# Altium PCB BLDCSuperBot.PcbDoc
Units mm, origin at the board's own origin, x right, y up, seen from the top; angles counter-clockwise.
Board outline 72 x 52 mm, 2 copper layers (Top Layer, Bottom Layer), stack 1.571 mm thick; 42 components, 30 nets, 142 pads, 52 vias.
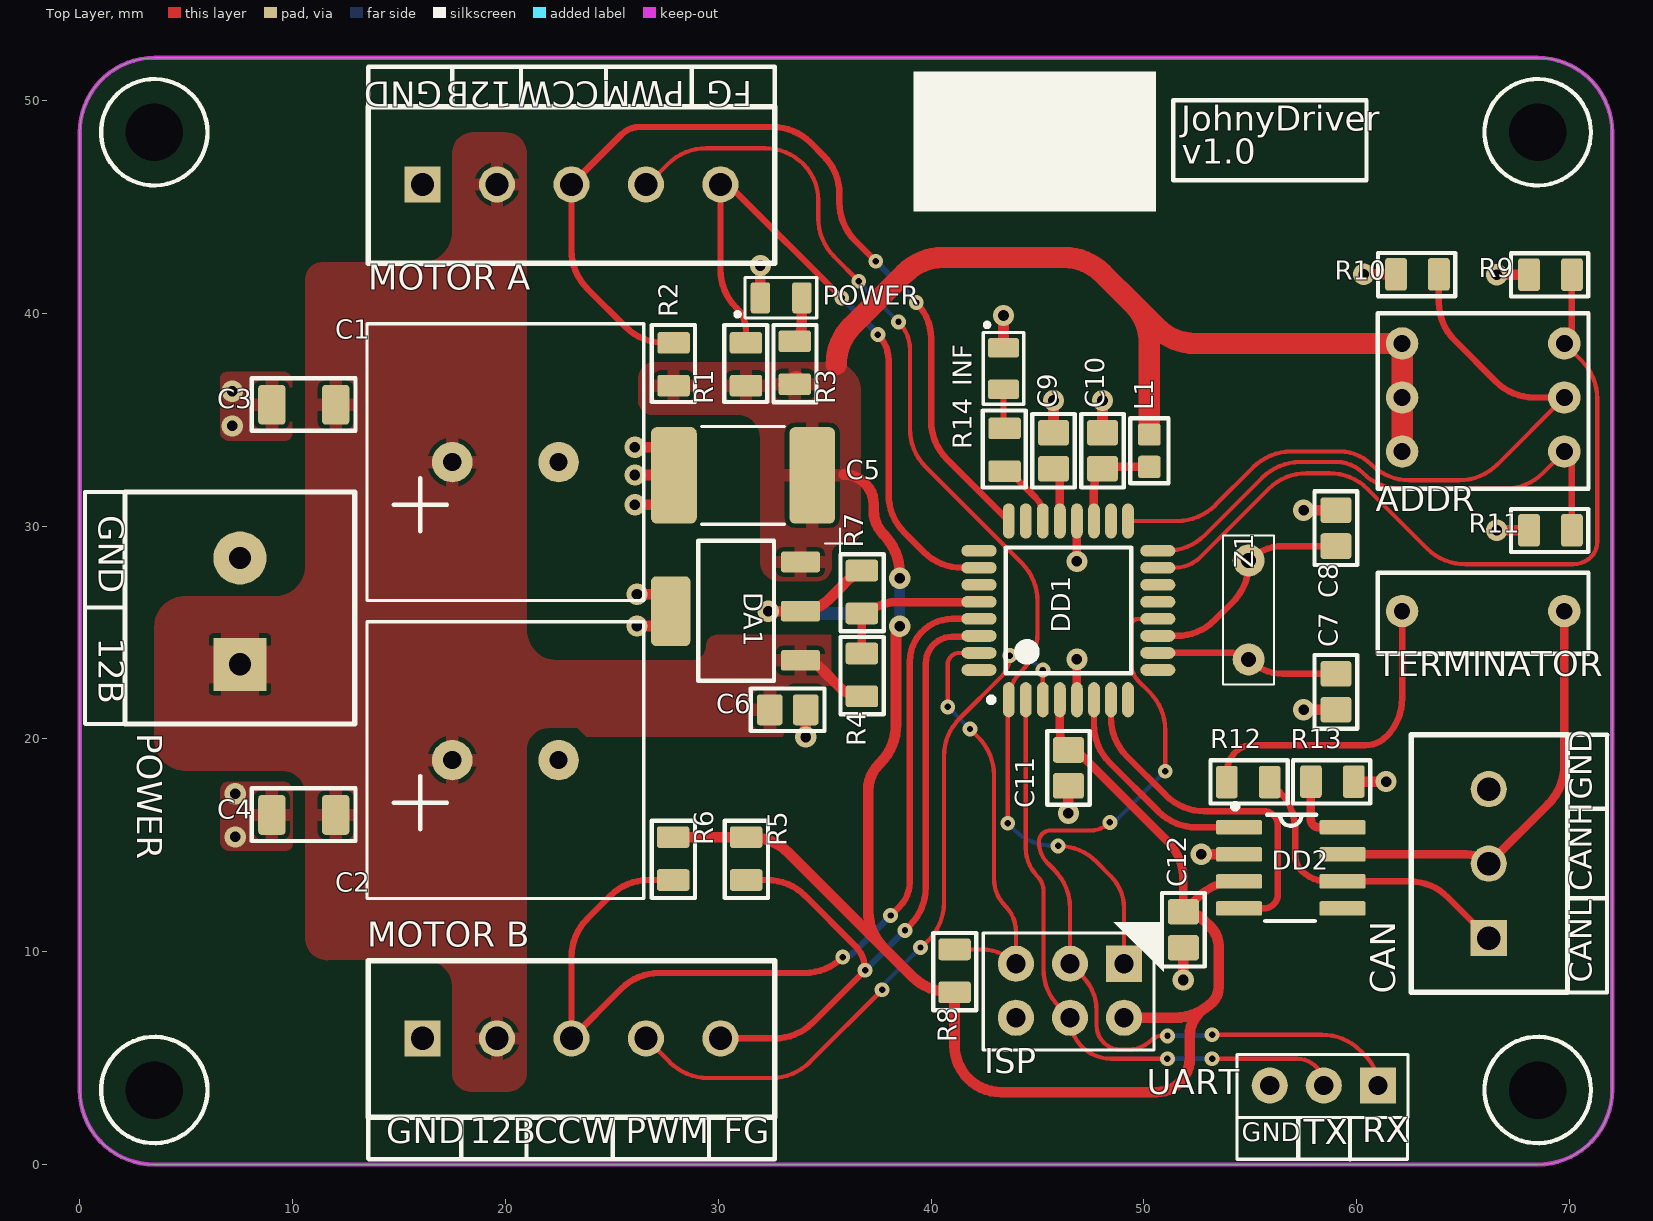
[diagram p0: Top Layer view]
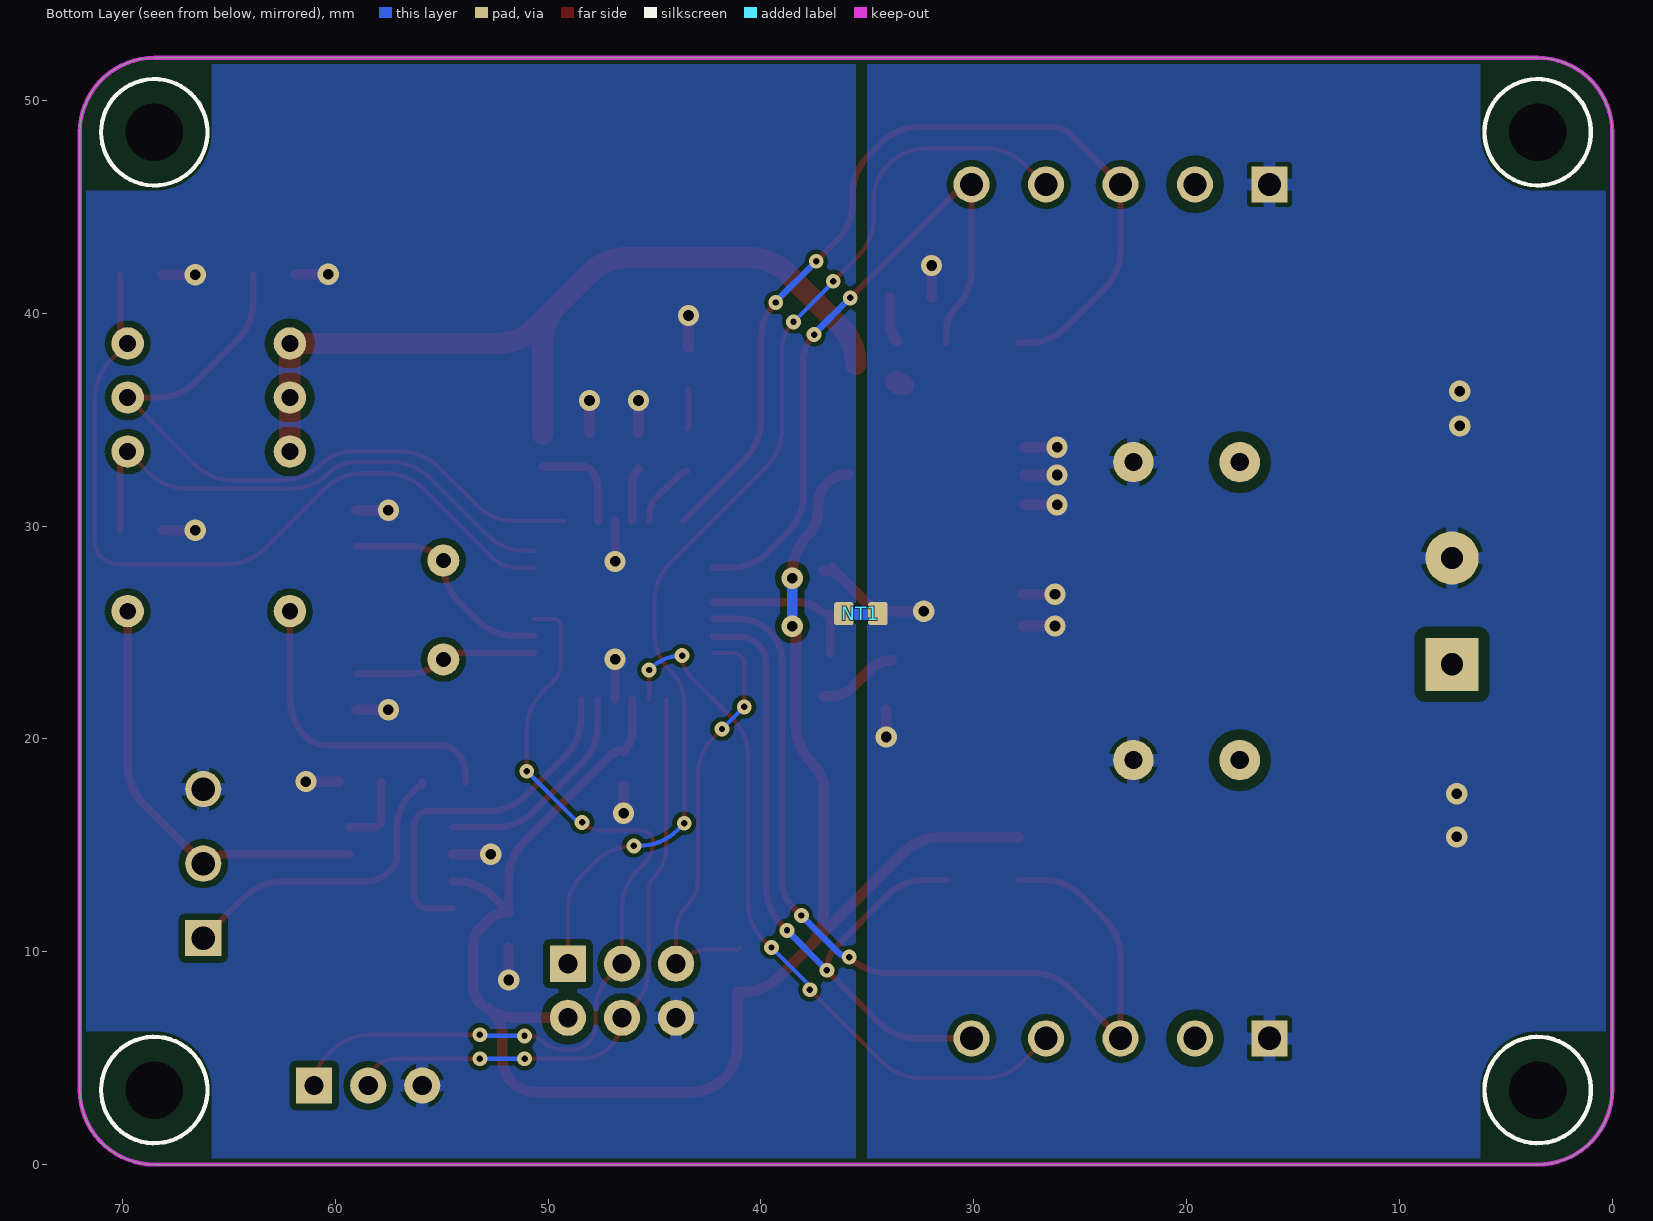
[diagram p1: Bottom Layer view, seen from below]

## Layer stack, top to bottom
Top Solder: solder mask 0.0102, Solder Resist, Dk 3.5
Top Layer: signal copper 0.0356
Dielectric 1: dielectric 1.5, FR-4, Dk 4.8
Bottom Layer: signal copper 0.0356
Bottom Solder: solder mask 0.0102, Solder Resist, Dk 3.5

## Board outline
0,3.5 ccw(c3.5,3.5) 3.5,0 68.5,0 ccw(c68.5,3.5) 72,3.5 72,48.5 ccw(c68.5,48.5) 68.5,52 3.5,52 ccw(c3.5,48.5) 0,48.5

## Design rules (kind name [scope] priority, off if disabled: settings)
Clearance Clearance_POWER_12B [InNet('12B') vs InNet('GND')] p1: gap=0.5 except(0.3: SMDPad-SMDPad)
Clearance Clearance_POWER_5B [InNet('5B') vs InNet('DGND')] p2: gap=0.3 except(0.2: SMDPad-SMDPad; 0.4: Arc-THPad Track-THPad THPad-THPad THPad-Fill THPad-Poly THPad-Region)
Clearance [All] p3: gap=0.2 except(0.3: Arc-THPad Track-THPad THPad-THPad THPad-Via THPad-Fill THPad-Poly THPad-Region THPad-Text)
HoleSize [All] p1: absolutevalues=TRUE maxlimit=5 minlimit=0.2 maxpercent=80.000 minpercent=20.000
HoleToHoleClearance [All] p1: gap=0 allowstackedmicrovias=TRUE
MinimumSolderMaskSliver [All] p1: minsoldermaskwidth=0.05
PolygonConnect NetTieDirect [InComponentClass('NetTieDirect')] p1: connectstyle=Direct reliefconductorwidth=0.254 reliefentries=4 polygonreliefangle="90 Angle" airgapwidth=0.254
PolygonConnect NetTieRelief [InComponentClass('NetTieRelief')] p2: connectstyle=Direct reliefconductorwidth=0.6 reliefentries=4 polygonreliefangle="90 Angle" airgapwidth=0.2
PolygonConnect PolygonConnect_GND [HasFootprint('TERMINAL 2 way-5mm') vs InNet('GND')] p3: connectstyle=Direct reliefconductorwidth=0.6 reliefentries=4 polygonreliefangle="90 Angle" airgapwidth=0.2
PolygonConnect PolygonConnect_GND_12B [HasFootprint('TERMINAL-2WAY-5MM') vs InNet('12B')] p4: connectstyle=Relief reliefconductorwidth=1.8 reliefentries=4 polygonreliefangle="90 Angle" airgapwidth=0.2
PolygonConnect PolygonConnect_GND_12B_2 [HasFootprint('TERMINAL-5WAY-5MM') vs InNet('12B')] p5: connectstyle=Relief reliefconductorwidth=1.8 reliefentries=4 polygonreliefangle="90 Angle" airgapwidth=0.2
PolygonConnect PolygonConnect_GND_12B_3 [HasFootprint('TERMINAL-5WAY-5MM_') vs InNet('12B')] p6: connectstyle=Relief reliefconductorwidth=1.8 reliefentries=4 polygonreliefangle="90 Angle" airgapwidth=0.2
PolygonConnect PolygonConnect_GND_12B_1 [HasFootprint('TERMINAL 3 way-3.5mm') vs InNet('12B')] p7: connectstyle=Direct reliefconductorwidth=0.6 reliefentries=4 polygonreliefangle="90 Angle" airgapwidth=0.2
PolygonConnect PolygonConnect_GND_1 [HasFootprint('TERMINAL 3 way-3.5mm') vs InNet('GND')] p8: connectstyle=Direct reliefconductorwidth=0.6 reliefentries=4 polygonreliefangle="90 Angle" airgapwidth=0.2
PolygonConnect PolygonConnect_via [IsVia] p9: connectstyle=Direct reliefconductorwidth=0.6 reliefentries=4 polygonreliefangle="90 Angle" airgapwidth=0.2
PolygonConnect [All] p10: connectstyle=Relief reliefconductorwidth=0.6 reliefentries=4 polygonreliefangle="90 Angle" airgapwidth=0.2
RoutingVias [All] p1: holewidth=0.711 width=1.27 viastyle="Through Hole" minholewidth=0.711 minwidth=1.27 maxholewidth=0.711 maxwidth=1.27
SilkToSilkClearance [All] p1: silktosilkclearance=0
SilkToSolderMaskClearance [IsPad] p1: minsilkscreentomaskgap=0 clearancetoexposedcopper=TRUE
SolderMaskExpansion [All] p1: expansion=0.05
Width [All] p1: maxlimit=3 minlimit=0.2 preferedwidth=0.3
25 further rules are at their usual default settings.

## Classes and differential pairs
component class NetTieDirect: NT1
component class NetTieRelief: NT1

## Components (designator, comment, footprint, x,y, rotation, side; value= is the part's Value field where it differs from the comment)
ADDR "Name" DIP3 69.75,33.5 r90 top (schematic designator SW1)
C1 "Capacitor_pol" K50-35(13X25)_V 20,33 r90 top
C2 "Capacitor_pol" K50-35(13X25)_V 20,19 r90 top
C3 "Capacitor" C1206 10.552,35.724 r0 top
C4 "Capacitor" C1206 10.552,16.45 r0 top
C5 "Capacitor_pol" "TANTAL CASE D" 31.214,32.382 r180 top
C6 "Capacitor" C0805 33.259,21.366 r180 top
C7 "Capacitor" C0805 59.017,22.211 r270 top
C8 "Capacitor" C0805 59.017,29.901 r90 top
C9 "Capacitor" C0805 45.75,33.538 r270 top
C10 "Capacitor" C0805 48.05,33.538 r270 top
C11 "Capacitor" C0805 46.45,18.638 r90 top
C12 "Capacitor" C0805 51.85,11.031 r90 top
CAN "Header_3_trm" TERMINAL-3WAY-3.5MM 66.2,5.388 r90 top (schematic designator X5)
DA1 "LM2940IMP" SOT-223 30.839,26 r90 top
DD1 "ATmega32M1-AU" TQFP-32 46.45,26.038 r90 top
DD2 "MCP2551-I/SN" SO8 56.9,13.938 r0 top
INF "LED" L_0805 43.4,37.4 r270 top (schematic designator VD2)
ISP "Программатор ISP mkII" PLS2-6 46.425,8.161 r270 top (schematic designator X4)
L1 "Inductor" L0603 50.25,33.538 r90 top
"MOTOR A" "Header_5_trm" TERMINAL-5WAY-3.5MM_ 17.852,46.048 r0 top (schematic designator X2)
"MOTOR B" "Header_5_trm" TERMINAL-5WAY-3.5MM 17.852,5.925 r0 top (schematic designator X3)
NT1 "" Pofigistor0603 35.3,25.885 r0 bottom net-tie
POWER "LED" L_0805 32.954,40.723 r0 top (schematic designator VD1)
POWER "Header_2_trm" TERMINAL-2WAY-5MM 7.525,26 r90 top (schematic designator X1)
R1 "Resistor_0,125Вт" R0805 31.3,37.6 r90 top
R2 "Resistor_0,125Вт" R0805 27.9,37.6 r90 top
R3 "Resistor_0,125Вт" R0805 33.591,37.671 r270 top
R4 "Resistor_0,125Вт" R0805 36.744,23.006 r270 top
R5 "Resistor_0,125Вт" R0805 31.306,14.375 r270 top
R6 "Resistor_0,125Вт" R0805 27.875,14.375 r270 top
R7 "Resistor_0,125Вт" R0805 36.744,26.902 r270 top
R8 "Resistor_0,125Вт" R0805 41.1,9.1 r270 top
R9 "Resistor_0,125Вт" R0805 69.1,41.812 r180 top
R10 "Resistor_0,125Вт" R0805 62.85,41.825 r180 top
R11 "Resistor_0,125Вт" R0805 69.1,29.8 r180 top
R12 "Resistor_0,125Вт" R0805 54.9,17.967 r0 top
R13 "Resistor_0,125Вт" R0805 58.851,17.992 r180 top
R14 "Resistor_0,125Вт" R0805 43.45,33.583 r90 top
TERMINATOR "DS1040-01" DIP1 69.75,26 r90 top (schematic designator SW2)
UART "Header_3_plg" PLS-3 58.45,3.714 r270 top (schematic designator X6)
Z1 "Crystal" HC-49S 54.917,26.056 r270 top

## Footprints (in the part's own frame and the unit in brackets; to place one, negate y for a bottom-side part, rotate by r counter-clockwise, add the part's x,y. Pads: shape width x height; smd on the part's side, far side on the other; paste and mask are expansions set on the pad)
C0805 [mm]
  rrect25% 1.21x1.46 smd paste-5: 1(-0.845,0) 2(0.845,0)
  silkscreen extent -1.73,-1 1.73,1, body extent -1,-0.62 1,0.63, height 0.78
C1206 [mm]
  rrect25% 1.28x1.87 smd: 1(-1.528,-0.024) 2(1.472,-0.024)
  silkscreen extent -2.48,-1.25 2.4,1.23, body extent -1.6,-0.85 1.6,0.85, height 1.75
DIP1 [mil]
  round 60 hole 30: 1(0,0) 2(0,300)
  silkscreen extent -79,-45 71,345, body extent -80,-42 71,342, height 269
DIP3 [mil]
  round 60 hole 31.5: 1(0,0) 2(100,0) 3(200,0) 4(200,300) 5(100,300) 6(0,300)
  silkscreen extent -69,-45 256,345, body extent -69,-43 251,346, height 276
HC-49S [mm] "Кварцевый резонатор"
  round 1.5 hole 0.7: 1(-2.325,0) 2(2.325,0)
  silkscreen extent -3.5,-1.2 3.5,1.2, body extent -5.67,-2.32 5.68,2.33, height 3.6
K50-35(13X25)_V [mm]
  round 1.9 hole 0.85 mask+0.102: 1(0,2.5)
  round 1.9 hole 0.85: 2(0,-2.5)
  silkscreen extent -6.5,-6.5 6.5,6.5, body extent -6.25,-6.25 6.25,6.25, height 25
L0603 [mm]
  rrect25% 1.05x1.07 smd paste-5: 1(-0.76,0) 2(0.76,0)
  silkscreen extent -1.53,-0.9 1.53,0.9, body extent -0.8,-0.4 0.8,0.4, height 0.8
L_0805 [mm] "SMD LED LAMP"
  rrect25% 0.91x1.46 smd: 1(-0.975,0) 2(0.975,0)
  silkscreen extent -2.15,-0.95 1.68,0.95, body extent -1.01,-0.62 1.01,0.63, height 1.1
PLS2-6 [mm] "Разъем для программатора ISP"
  rect 1.7x1.7 hole 0.9: 1(-1.275,2.64)
  round 1.7 hole 0.9: 2(1.265,2.64) 3(-1.275,0.1) 4(1.265,0.1) 5(-1.275,-2.44) 6(1.265,-2.44)
  silkscreen extent -2.73,-3.98 2.77,4.05, body extent -2.54,-3.81 2.54,3.81, height 8.54
PLS-3 [mm] "Разъем для программатора ISP"
  rect 1.7x1.7 hole 0.9: 1(0,2.54)
  round 1.7 hole 0.9: 2(0,0) 3(0,-2.54)
  silkscreen extent -1.45,-4.08 1.5,3.95, body extent -1.27,-3.91 1.27,3.71, height 8.54
Pofigistor0603 [mm]
  rrect25% 0.92x1.08 smd paste+0: 1(-0.8,0)
  rrect25% 0.92x1.08 smd: 2(0.8,0)
  Top Layer region: -0.8,0.3 0.8,0.3 0.8,-0.3 -0.8,-0.3
R0805 [mm] "Chip Resistor, 2-Leads, Body 2,10x1,30mm, IPC Medium Density"
  rrect25% 1.02x1.53 smd paste-5: 1(-1.008,0) 2(1.008,0)
  silkscreen extent -1.78,-1 1.85,1.02, body extent -1.1,-0.7 1.1,0.7, height 0.55
SO8 [mm]
  rrect25% 2.17x0.68 smd: 1(-2.43,1.905) 2(-2.43,0.635) 3(-2.43,-0.635) 4(-2.43,-1.905) 5(2.43,-1.905) 6(2.43,-0.635) 7(2.43,0.635) 8(2.43,1.905)
  silkscreen extent -2.74,-2.5 1.2,3.02, body extent -3,-2.54 3,2.54, height 1.7
SOT-223 [mm]
  rrect25% 0.97x1.85 smd: 1(-2.311,-3.024) 2(0,-3.024) 3(2.311,-3.024)
  rrect25% 3.27x1.85 smd: 2(0,3.074)
  silkscreen extent -3.28,-1.78 3.3,1.78, body extent -3.25,-3.54 3.25,3.54, height 1.65
"TANTAL CASE D" [mm]
  rrect25% 2.15x4.53 smd: 1(-3.2,0) 2(3.3,0)
  silkscreen extent -5.2,-2.3 2,4, body extent -3.8,-2.3 3.8,2.3, height 4
TERMINAL-2WAY-5MM [mm]
  rect 2.5x2.5 hole 1.05: 1(-2.5,0)
  round 2.5 hole 1.05: 2(2.5,0)
  silkscreen extent -5.3,-5.4 5.6,5.4, body extent -5,-5.07 5.3,5.13, height 14.3
TERMINAL-3WAY-3.5MM [mm]
  rect 1.7x1.7 hole 1.1: 1(5.25,0)
  round 1.7 hole 1.1: 2(8.75,0) 3(12.25,0)
  silkscreen extent 2.7,-3.7 14.8,3.65, body extent 3,-3.37 14.5,3.43, height 8.4
TERMINAL-5WAY-3.5MM [mm]
  rect 1.7x1.7 hole 1.1: 1(-1.75,0)
  round 1.7 hole 1.1: 2(1.75,0) 3(5.25,0) 4(8.75,0) 5(12.25,0)
  silkscreen extent -4.3,-3.7 14.8,3.65, body extent -4,-3.37 14.5,3.43, height 8.4
TERMINAL-5WAY-3.5MM_ [mm]
  rect 1.7x1.7 hole 1.1: 1(-1.75,0)
  round 1.7 hole 1.1: 2(1.75,0) 3(5.25,0) 4(8.75,0) 5(12.25,0)
  silkscreen extent -4.3,-3.7 14.8,3.65, body extent -4,-3.43 14.5,3.37, height 8.4
TQFP-32 [mm] "Thin QFP, 32-Leads, Body 7x7mm, Pitch 0.8mm, IPC Medium Density"
  oval 1.65x0.55 smd: 1(-4.2,2.8) 2(-4.2,2) 3(-4.2,1.2) 4(-4.2,0.4) 5(-4.2,-0.4) 6(-4.2,-1.2) 7(-4.2,-2) 8(-4.2,-2.8) 17(4.2,-2.8) 18(4.2,-2) 19(4.2,-1.2) 20(4.2,-0.4) 21(4.2,0.4) 22(4.2,1.2) 23(4.2,2) 24(4.2,2.8)
  oval 0.55x1.65 smd: 9(-2.8,-4.2) 10(-2,-4.2) 11(-1.2,-4.2) 12(-0.4,-4.2) 13(0.4,-4.2) 14(1.2,-4.2) 15(2,-4.2) 16(2.8,-4.2) 25(2.8,4.2) 26(2,4.2) 27(1.2,4.2) 28(0.4,4.2) 29(-0.4,4.2) 30(-1.2,4.2) 31(-2,4.2) 32(-2.8,4.2)
  silkscreen extent -4.32,-2.95 2.95,3.75, body extent -4.6,-4.6 4.6,4.6, height 1.2

## Part data
ADDR: library part btn6, "DIP переключатель адреса"
C1 C2: library part cap262, "Конденсатор полярный"
C3 C4: library part cap188, "Конденсатор"
C5: library part cap260, "Конденсатор полярный"
C6: library part cap148, "Конденсатор"
C7 C8: library part cap222, "Конденсатор"
C9 C10 C11 C12: library part cap161, "Конденсатор"
CAN: library part connect35, "Разъем - 3 конт. клеммник"
DA1: library part pwr4, "Low-Dropout Regulator for 5-V to 3.3-V Conversion"
DD1: library part microcont12, "Микроконтроллер 8-Бит, AVR, 16МГц, 32КБ Flash"
DD2: library part interf12, "High-Speed CAN Transceiver"
INF POWER: library part diode5, "Светодиод"
ISP: library part connect0, "Разъем - 6 конт. розетка"
L1: library part ind0, "EMI Suppression Filter"
"MOTOR A": library part connect61, "Разъем - 5 конт. клеммник"
"MOTOR B": library part connect60, "Разъем - 5 конт. клеммник"
NT1: library part res1930
POWER: library part connect21, "Разъем - 2 конт. клеммник"
R1 R2 R5 R6 R8 R9 R10 R11 R13: library part res97, "Резистор"
R3 R14: library part res66, "Резистор"
R4 R7: library part res84, "Резистор"
R12: library part res51, "Резистор"
TERMINATOR: library part btn1, "DIP переключатель"
UART: library part connect33, "Разъем - 3 конт. вилка"
Z1: library part crystal7, "Кварцевый резонатор"

## Free pads (board coordinates)
  round 0 hole 2.7 unplated: ""(3.5,3.5) ""(3.5,48.5) ""(68.5,3.5) ""(68.5,48.5)

## Via types
v1: diameter 1, hole 0.5, Top Layer to Bottom Layer, tented both sides, 28 vias
v2: diameter 0.7, hole 0.3, Top Layer to Bottom Layer, tented both sides, 24 vias

## Nets (pads, with @x,y where several pads share a name; then routed paths per layer and width w, separated by ;. In a path a pad name is that pad's centre, name@x,y a point inside that pad or via, vN(x,y) a via of type N, cw(c..) or ccw(c..) an arc to the next point about the centre after c; other vN are vias at no path point)
5B: ADDR.4 ADDR.5 ADDR.6 C5.1 C11.2 C12.2 DA1.3 DD1.4 DD2.3 ISP.2 L1.2 R1.1 R2.1 R3.2 R5.1 R6.1 R8.2 | length 126.1
  Top Layer w0.4: DD1.4 46.05,20.348 ccw(c47.416,20.348) C11.2@46.45,19.383 ; C11.2@46.851,19.316 ccw(c46.45,18.915) C11.2 cw(c46.45,18.613) 47.065,19.228 51.106,15.186 cw(c49.31,13.39) 51.85,13.39 C12.2 52.533,12.559 cw(c54.329,10.763) 54.329,13.303 DD2.3
  Top Layer w0.5: R6.1 R5.1 31.518,15.382 cw(c31.518,12.842) 33.314,14.639 37.753,10.2 ; 35.898,32.423 cw(c35.898,31.021) 37.3,31.021 37.3,30.736 ccw(c38.925,30.736) 37.776,29.587 cw(c35.98,27.791) 38.52,27.791 v1(38.52,27.553) ; v1@38.52,25.337 ccw(c38.935,24.921) 38.348,24.921 38.348,20.655 cw(c35.808,20.655) 37.604,18.859 37.545,18.8 ccw(c38.754,17.591) 37.044,17.591 37.044,11.911 ccw(c39.464,11.911) 37.753,10.2 ; ISP.2 51.428,6.896 ccw(c51.428,9.436) 52.733,7.256 ; C12.2 cw(c51.85,10.519) 52.809,11.478 53.15,11.138 cw(c52.287,10.274) 53.508,10.274 53.508,8.325 cw(c52.539,8.325) 53.224,7.639 cw(c51.428,9.436) 52.733,7.256 ; 37.753,10.2 39.116,8.836 ccw(c40.912,10.633) 40.912,8.093 R8.2 41.1,5.586 ccw(c43.286,5.586) 43.286,3.4 50.581,3.4 ccw(c50.581,4.969) 52.15,4.969 52.15,6.064 cw(c53.621,6.064) 52.581,7.105 52.733,7.256
  Top Layer w1: R3.2@33.3,36.626 ccw(c33.3,37.131) R3.2@33.657,36.774 ; 35.54,37.604 cw(c38.08,37.604) 36.284,39.401 38.755,41.872 cw(c40.551,40.076) 40.551,42.616 46.255,42.616 cw(c46.255,40.076) 48.051,41.872 49.506,40.417 ; L1.2 50.25,38.621 ccw(c47.71,38.621) 49.506,40.417 ; ADDR.6 ADDR.5 ADDR.4 52.395,38.58 cw(c52.395,41.12) 50.599,39.324 49.506,40.417
  Bottom Layer w0.5: v1(38.52,25.29) v1(38.52,27.553) v1@38.52,27.6
12B: "MOTOR A.2" "MOTOR B.2" C1.1 C2.1 C3.2 C4.2 C6.2 DA1.1 POWER.1@7.525,23.5 R4.2 | length 3.8
  Top Layer w0.5: DA1.1 cw(c33.863,22.289) 34.852,23.279 35.701,22.431 ccw(c36.744,23.474) R4.2 R4.2@37.044,21.999
ADR0: ADDR.1 DD1.16 R11.1 | length 25.4
  Top Layer w0.2: DD1.16 51.073,28.838 ccw(c51.073,31.378) 52.869,29.581 55.551,32.264 cw(c57.347,30.468) 57.347,33.008 59.047,33.008 cw(c59.047,31.253) 60.287,32.494 ccw(c62.083,34.29) 62.083,31.75 66.948,31.75 ccw(c66.948,34.29) 68.744,32.494 ADDR.1
  Top Layer w0.3: ADDR.1 cw(c68.888,32.638) 70.107,32.638 R11.1
ADR1: ADDR.2 DD1.17 R10.1 | length 32.9
  Top Layer w0.2: DD1.17 51.557,30.238 ccw(c51.557,32.778) 53.353,30.981 55.127,32.756 cw(c56.923,30.96) 56.923,33.5 59.219,33.5 cw(c59.219,31.439) 60.676,32.896 ccw(c62.472,34.693) 62.472,32.153 64.81,32.153 ccw(c64.81,34.693) 66.606,32.896 ADDR.2
  Top Layer w0.3: R10.1 63.857,40.519 ccw(c66.397,40.519) 64.601,38.723 66.54,36.784 ccw(c68.336,38.58) 68.336,36.04 ADDR.2
ADR2: ADDR.3 DD1.15 R9.1 | length 37.6
  Top Layer w0.2: DD1.15 51.431,28.038 ccw(c51.431,29.766) 52.653,28.544 55.85,31.741 cw(c57.646,29.945) 57.646,32.485 58.713,32.485 cw(c58.713,29.945) 60.509,31.741 63.306,28.944 ccw(c65.102,30.74) 65.102,28.2 70.17,28.2 ccw(c70.17,29.374) 71,28.544 ccw(c70.276,29.268) 71.3,29.268 71.3,35.978 ccw(c68.76,35.978) 70.556,37.774 ADDR.3
  Top Layer w0.3: ADDR.3 ccw(c68.888,39.442) 70.107,39.442 R9.1
CW/CCW_A: "MOTOR A.3" DD1.24 R2.2 | length 43.8
  Top Layer w0.3: R2.2 27.445,38.607 cw(c27.445,41.147) 25.649,39.351 23.846,41.154 cw(c25.642,42.95) 23.102,42.95 23.102,46.048 25.453,48.399 cw(c26.3,47.553) 26.3,48.75 32.548,48.75 cw(c32.548,46.21) 34.344,48.006 34.946,47.404 cw(c33.15,45.608) 35.69,45.608 35.69,45.203 ccw(c38.23,45.203) 36.434,43.407 v2(37.4,42.441) ; v2(39.3,40.5) cw(c37.61,38.81) 40,38.81 40,34.94 ccw(c42.54,34.94) 40.744,33.144 DD1.24
  Bottom Layer w0.3: v2(37.4,42.441) 39.271,40.57 cw(c39.201,40.5) v2(39.3,40.5)
CW/CCW_B: "MOTOR B.3" DD1.29 R6.2 | length 44.3
  Top Layer w0.3: R6.2 26.719,13.368 ccw(c26.719,10.828) 24.922,12.624 23.846,11.547 ccw(c25.642,9.751) 23.102,9.751 23.102,5.925 25.433,8.256 cw(c27.229,6.46) 27.229,9 34.043,9 ccw(c34.043,11.552) v2(35.847,9.747) ; v2(38.096,11.7) 38.52,12.124 ccw(c37.361,13.283) 39,13.283 39,23.638 cw(c41,23.638) 41,25.638 DD1.29 ; v2(35.847,9.747) cw(c35.883,9.747) 35.858,9.772 35.847,9.762 v2(35.847,9.747)
  Bottom Layer w0.3: v2@35.847,9.762 v2(35.847,9.747) ccw(c35.847,10.462) 36.353,9.957 v2(38.096,11.7)
DGND: C7.2 C8.2 C9.1 C10.1 C11.1 C12.1 CAN.3 DD1.5 DD1.20 DD2.2 INF.1 ISP.6 NT1.2 R9.2 R10.2 R11.2 R13.1 UART.3 | length 22.3
  Top Layer w0.4: DD1.5 v1(46.85,23.738) ; v1(46.85,28.337) DD1.20
  Top Layer w0.5: INF.1 v1(43.4,39.893) ; C9.1 v1(45.75,35.9) ; v1@46.45,16.275 C11.1 ; C10.1 v1(48.05,35.9) ; v1(51.85,8.668) C12.1 ; v1(52.69,14.572) DD2.2 ; v1(57.5,21.366) C7.2 ; v1(57.5,30.746) C8.2 ; R13.1 v1(61.377,17.992) ; v1(60.325,41.825) R10.2 ; v1(66.574,29.8) R11.2 ; v1(66.574,41.812) R9.2
  other v1: 46.45,16.5
FG_A: "MOTOR A.5" DD1.26 R1.2 | length 31.8
  Top Layer w0.3: R1.2 31.3,39.158 ccw(c29.75,39.158) 30.846,40.254 cw(c32.642,42.05) 30.102,42.05 30.102,46.048 cw(c30.102,45.147) 30.739,45.784 v2(35.8,40.723) ; v2(37.5,38.993) cw(c36.293,37.785) 38,37.785 38,31.49 ccw(c40.54,31.49) 38.744,29.694 39.656,28.781 ccw(c41.452,30.578) 41.452,28.038 DD1.26
  Bottom Layer w0.3: v2(35.8,40.723) 37.479,39.044 cw(c37.427,38.993) v2(37.5,38.993)
FG_B: "MOTOR B.5" DD1.30 R5.2 | length 34.3
  Top Layer w0.3: 30.102,5.925 32.642,5.925 ccw(c32.642,8.465) 34.438,6.669 v2(36.9,9.131) ccw(c35.255,9.131) 36.418,10.293 34.088,12.624 ccw(c32.292,10.828) 32.292,13.368 R5.2 ; v2(38.769,11) 39.006,11.237 ccw(c37.21,13.033) 39.75,13.033 39.75,23.55 cw(c41,23.55) 41,24.8 42.213,24.8 ccw(c42.213,24.838) DD1.30
  Bottom Layer w0.3: v2(36.9,9.131) v2(38.769,11)
GND: "MOTOR A.1" "MOTOR B.1" C1.2 C2.2 C3.1 C4.1 C5.2 C6.1 DA1.2 NT1.1 POWER.1@31.979,40.723 POWER.2@7.525,28.5 R7.1 | length 16.4
  Top Layer w0.5: v1(26.082,31) C5.2@27.6,31 ; v1(26.082,32.4) C5.2@27.6,32.4 ; v1(26.082,33.7) C5.2@27.6,33.7 ; v1(26.182,25.3) DA1.2@27.7,25.3 ; v1(26.182,26.8) DA1.2@27.7,26.8 ; POWER.1@31.979,40.723 v1(31.979,42.241) ; v1(32.345,26) 33.863,26 ccw(c33.863,27.865) 35.182,26.546 R7.1@36.645,28.009 ; v1(34.104,20.088) C6.1 ; R7.1@36.192,27.557 cw(c37.044,26.705) R7.1@37.044,27.91
  other v1: 7.3,15.393 7.3,17.427 7.163,34.705 7.163,36.338
INF_LED: DD1.22 R14.1 | length 3.1
  Top Layer w0.3: R14.1 cw(c43.45,32.057) 43.817,32.423 44.9,31.34 cw(c44.055,30.495) 45.25,30.495 DD1.22
MISO/PWM_A: "MOTOR A.4" DD1.1 ISP.1 | length 53.5
  Top Layer w0.2: 26.602,46.048 ccw(c26.602,46.224) 26.727,46.1 27.633,47.006 cw(c29.429,45.21) 29.429,47.75 32.198,47.75 cw(c32.198,45.21) 33.994,47.006 cw(c32.289,45.301) 34.7,45.301 34.7,44.452 ccw(c37.24,44.452) 35.444,42.656 v2(36.6,41.5) ; v2(38.469,39.591) cw(c37.171,38.294) 39.006,38.294 39.006,34.566 ccw(c41.546,34.566) 39.75,32.77 44.256,28.264 cw(c42.46,26.468) 45,26.468 45,24.977 cw(c42.46,24.977) 44.256,23.181 44.194,23.119 ccw(c45.627,21.685) 43.6,21.685 v2(43.6,16.038) ; v2(45.969,14.973) cw(c45.969,12.433) 47.765,14.229 48.433,13.561 cw(c46.908,12.036) 49.065,12.036 ISP.1
  Bottom Layer w0.2: v2(36.6,41.5) ccw(c36.697,41.5) 36.628,41.432 v2(38.469,39.591) ; v2(43.6,16.038) 43.921,15.717 ccw(c45.717,17.513) 45.717,14.973 v2(45.969,14.973)
MOSI/TX: DD1.2 ISP.4 UART.2 | length 29.3
  Top Layer w0.2: DD1.2 44.45,14.865 ccw(c46.328,14.865) 45,13.538 cw(c44.336,12.874) 45.275,12.874 45.275,9.198 ccw(c47.815,9.198) 46.019,7.402 ISP.4 ccw(c48.452,6.896) 48.452,4.969 v2(51.1,4.969) ; v2(53.2,4.969) 57.195,4.969 cw(c57.195,3.714) UART.2
  Bottom Layer w0.2: v2(51.1,4.969) v2(53.2,4.969)
NetC9_2: C9.2 DD1.21 | length 2.5
  Top Layer w0.4: C9.2 cw(c45.026,31.968) 46.05,31.968 DD1.21
NetC10_2: C10.2 DD1.19 L1.1 | length 4.6
  Top Layer w0.4: DD1.19 47.65,31.727 cw(c49.016,31.727) C10.2 ; C10.2@48.255,32.777 L1.1
NetDD2_6: CAN.1 DD2.6 R12.2 | length 14.7
  Top Layer w0.3: R12.2 56.396,17.479 cw(c54.698,15.78) 57.1,15.78 57.1,14.55 ccw(c58.161,14.55) 57.411,13.8 ccw(c58.612,15.001) 58.612,13.303 DD2.6 62.483,13.303 cw(c62.483,10.763) 64.279,12.559 CAN.1
  Top Layer w0.4: R12.2@55.907,17.821 R12.2
NetDD2_7: CAN.2 DD2.7 TERMINATOR.1 | length 20.2
  Top Layer w0.4: DD2.7 65.15,14.573 cw(c65.15,13.087) CAN.2 69.006,16.944 ccw(c67.21,18.74) 69.75,18.74 TERMINATOR.1
NetDD2_8: DD2.8 R13.2 | length 3.5
  Top Layer w0.4: R13.2 57.844,16.199 ccw(c58.2,16.199) 58.2,15.843 DD2.8
NetR3_1: POWER.2@33.929,40.723 R3.1 | length 2.1
  Top Layer w0.5: R3.1 ccw(c32.776,39.494) 33.929,39.494 POWER.2@33.929,40.723
NetR12_1: R12.1 TERMINATOR.2 | length 14.9
  Top Layer w0.3: R12.1 53.893,18.393 cw(c55.292,18.393) 54.302,19.383 cw(c55.069,18.616) 55.069,19.7 60.405,19.7 ccw(c60.405,21.087) 61.386,20.106 ccw(c59.59,21.902) 62.13,21.902 TERMINATOR.2
NetR14_2: INF.2 R14.2 | length 1.9
  Top Layer w0.3: INF.2 43.4,34.64 ccw(c43.45,34.64) R14.2
OSC1: C7.1 DD1.10 Z1.2 | length 8.6
  Top Layer w0.3: DD1.10 54.178,24.038 cw(c54.178,22.992) Z1.2 ccw(c56.547,25.361) 56.547,23.056 C7.1
OSC2: C8.1 DD1.11 Z1.1 | length 10.5
  Top Layer w0.3: DD1.11 51.535,24.838 ccw(c51.535,27.378) 53.331,25.581 54.173,26.423 ccw(c52.377,28.22) 54.917,28.22 Z1.1 cw(c56.547,26.752) 56.547,29.056 C8.1
PWM_B: "MOTOR B.4" DD1.3 | length 34.3
  Top Layer w0.2: 26.602,5.925 27.716,4.811 ; 27.716,4.811 ccw(c29.512,6.607) 29.512,4.067 32.501,4.067 ccw(c32.501,6.607) 34.297,4.811 ; 34.297,4.811 v2(37.7,8.213) ; v2@39.522,10.178 39.856,10.512 ccw(c38.06,12.308) 40.6,12.308 40.6,19.172 cw(c43.14,19.172) 41.344,20.968 43.286,22.91 ccw(c42.283,23.913) v2(43.701,23.913) ; DD1.3 v2@45.25,23.088
  Bottom Layer w0.2: v2(37.7,8.213) cw(c38.149,8.213) 37.831,8.531 v2(39.5,10.2) ; v2(43.701,23.913) cw(c43.701,21.805) 45.192,23.296 v2(45.25,23.238)
RESET: DD1.31 ISP.5 R8.1 | length 20.1
  Top Layer w0.2: v2(40.78,21.5) 40.78,23.5 cw(c41.317,23.5) 41.317,24.038 DD1.31 ; R8.1@41,10.208 ccw(c41.1,10.208) R8.1 42.363,10.108 cw(c42.363,7.813) ISP.5 43.985,10.95 ccw(c42.329,10.95) 43.5,12.121 cw(c44.828,13.448) 42.95,13.448 42.95,18.289 ccw(c40.41,18.289) 42.206,20.085 v2(41.828,20.463)
  Bottom Layer w0.2: v2@40.791,21.5 v2(41.828,20.463)
RX_CAN: DD1.7 DD2.4 | length 16.7
  Top Layer w0.3: DD1.7 48.45,20.982 ccw(c50.99,20.982) 49.194,19.186 51.036,17.344 ccw(c52.832,19.14) 52.832,16.6 55.625,16.6 cw(c55.625,15.932) 56.292,15.932 56.292,12.7 cw(c55.625,12.7) 55.625,12.032 DD2.4
SCK/RX: DD1.12 ISP.3 UART.1 | length 41.4
  Top Layer w0.2: ISP.3@46.634,9.173 cw(c46.897,9.436) ISP.3 ; v2@48.589,16.077 v2(48.4,16.077) cw(c47.491,16.986) 47.491,15.7 45.617,15.7 ccw(c45.617,15.147) 45.064,15.147 ccw(c46.47,15.147) 45.476,14.153 45.781,13.848 cw(c43.985,12.052) 46.525,12.052 ISP.3 ; DD1.12 49.738,25.638 ccw(c49.738,25.3) 49.4,25.3 49.4,23.533 ccw(c50.543,23.533) 49.735,22.725 50.256,22.204 cw(c48.46,20.408) 51,20.408 v2(51,18.479) ; v2(51.106,6.045) 50.791,6.045 ccw(c50.791,5.492) 50.4,5.883 cw(c49.233,7.05) 49.233,5.4 48.9,5.4 cw(c48.9,6.525) 47.775,6.525 47.775,7.222 ccw(c45.448,7.222) 47.094,8.867 ISP.3 ; v2(53.2,6.1) 58.363,6.1 cw(c58.363,3.56) 60.159,5.356 60.416,5.098 cw(c59.032,3.714) UART.1
  Bottom Layer w0.2: v2(48.4,16.077) 48.589,16.077 v2@50.991,18.479 ; v2(51.106,6.045) 53.068,6.045 ccw(c53.068,6.232) v2(53.2,6.1)
TX_CAN: DD1.6 DD2.1 | length 10.4
  Top Layer w0.3: DD1.6 47.65,20.669 ccw(c50.19,20.669) 48.394,18.872 50.68,16.586 ccw(c52.476,18.383) 52.476,15.843 DD2.1
VOLTAGE: DD1.28 R4.1 R7.2 | length 7.2
  Top Layer w0.3: DD1.28@42.25,26.423 DD1.28
  Top Layer w0.4: R4.1 R7.2 ; R7.2@37.044,25.895 cw(c38.321,24.618) 38.321,26.423 DD1.28@42.25,26.423
pads on no net: DD1.8 DD1.9 DD1.13 DD1.14 DD1.18 DD1.23 DD1.25 DD1.27 DD1.32 DD2.5

## Polygon pours and split planes (outlines as drawn)
5B on Top Layer "Top Signal Layer-No Net" (solid, remove dead copper, pour order 32): 28.73,35.238 30.867,35.238 cw(c30.867,34.145) 31.96,34.145 31.96,28.336 ccw(c32.896,28.336) 32.896,27.4 34.631,27.4 ccw(c34.631,28.096) 35.327,28.096 35.327,28.698 cw(c35.811,28.698) 35.812,29.182 36.064,29.182 ccw(c36.064,29.818) 36.7,29.818 36.7,36.327 ccw(c35.328,36.328) 35.327,37.7 27,37.7 ccw(c27,36.95) 26.25,36.95 26.25,35.877 ccw(c26.889,35.877) 26.889,35.238
12B on Top Layer "Top Signal Layer-No Net" (solid, remove dead copper, pour order 24): 3.5,25.25 3.5,20 ccw(c5,20) 5,18.5 9.513,18.5 cw(c9.513,17.413) 10.6,17.413 10.6,10.65 ccw(c11.65,10.65) 11.65,9.6 16.231,9.6 cw(c16.231,8.331) 17.5,8.331 17.5,4.3 ccw(c18.375,4.3) 18.375,3.425 20.125,3.425 ccw(c20.125,4.3) 21,4.3 21,19.5 cw(c22,19.5) 22,20.5 23.4,20.5 23.8,20.1 33.1,20.1 33.1,20.5 33.1,22.5 35.3,22.5 35.3,24.9 33.1,24.9 30,24.9 ccw(c30,24.329) 29.429,24.329 cw(c28.8,24.329) 28.8,23.7 22.4,23.7 cw(c22.4,25.1) 21,25.1 21,47.5 ccw(c20.002,47.5) 20.002,48.498 18.492,48.498 ccw(c18.492,47.506) 17.5,47.506 17.5,43.8 cw(c16.1,43.8) 16.1,42.4 11.4,42.4 ccw(c11.399,41.601) 10.6,41.6 10.6,28.141 cw(c9.159,28.141) 9.159,26.7 4.95,26.7 ccw(c4.95,25.25)
GND on Top Layer "Top Layer-No Net" (solid, remove dead copper, pour order 22): 9.994,34.363 9.994,36.786 ccw(c9.52,36.786) 9.52,37.26 6.959,37.26 ccw(c6.959,36.891) 6.59,36.891 6.59,34.442 ccw(c7.021,34.442) 7.02,34.011 9.638,34.008 ccw(c9.638,34.363)
GND on Top Layer "Top Layer-No Net" (solid, remove dead copper, pour order 6): 10.013,15.089 10.013,17.512 ccw(c9.539,17.512) 9.539,17.986 6.978,17.986 ccw(c6.978,17.617) 6.609,17.617 6.609,15.168 ccw(c7.04,15.168) 7.039,14.737 9.657,14.734 ccw(c9.657,15.089)
GND on Bottom Layer "Top Signal Layer-No Net" (solid, remove dead copper, pour order 26): 0,52 0,0 35,0 35,52
DGND on Bottom Layer "Top Signal Layer-No Net" (solid, remove dead copper, pour order 30): 72,52 72,0 35.54,0 35.54,52

## Keep-outs
Keep-Out Layer:
  the board outline again, w0.2

## Other copper
Bottom Layer:
  pour cut-out: 6.2,52 0,52 0,45.748 3.483,45.748 ccw(c3.483,48.464) 6.2,48.464
  pour cut-out: 6.2,0 0,0 0,6.252 3.483,6.252 cw(c3.483,3.536) 6.2,3.536
  pour cut-out: 65.8,52 72,52 72,45.748 68.517,45.748 cw(c68.517,48.464) 65.8,48.464
  pour cut-out: 65.8,0 72,0 72,6.252 68.517,6.252 ccw(c68.517,3.536) 65.8,3.536

## Silkscreen, mask and mechanical layers (free items; w line width, h text height)
Top Overlay:
  circle w0.2: c3.5,3.5 r2.5
  circle w0.2: c68.5,3.5 r2.5
  circle w0.2: c68.5,48.5 r2.5
  circle w0.2: c3.5,48.5 r2.5
  rectangle: 39.175,44.777 50.556,51.35
  region: 48.58,11.391 50.92,11.391 50.92,9.05
  lines w0.15: 54.375,0.246 62.382,0.246 62.382,2.285 ; 54.375,0.273 54.375,2.314
  lines w0.2: 0.246,31.6 0.246,20.718 0.264,20.7 2.125,20.7 ; 0.273,31.6 2.125,31.6 ; 0.322,26.175 2.073,26.175 ; 13.552,2.225 13.552,0.281 13.587,0.246 32.652,0.246 ; 13.552,49.698 13.552,51.559 13.57,51.577 32.652,51.577 32.652,49.698 ; 17.506,49.75 17.506,51.501 ; 17.929,0.322 17.929,2.073 ; 20.727,49.698 20.727,51.55 ; 20.992,0.373 20.992,2.225 ; 24.727,49.698 24.727,51.55 ; 25.047,0.273 25.047,2.125 ; 28.757,49.698 28.757,51.55 ; 29.561,0.273 29.561,2.125 ; 32.652,0.275 32.652,2.225 ; 57.25,0.273 57.25,2.125 ; 59.675,0.246 59.675,2.125 ; 69.9,8.088 71.752,8.087 71.752,20.17 ; 69.9,12.513 71.752,12.513 ; 69.9,20.188 71.761,20.188 71.779,20.17 ; 69.952,16.713 71.703,16.712 ; 51.375,46.25 51.375,50 60.45,50 60.45,46.25 51.375,46.25
  text "PWM" at 28.425,51.3 h2 r180
  text "FG" at 31.6,51.3 h2 r180
  text "GND" at 17.03,51.275 h2 r180
  text "12B" at 20.308,51.275 h2 r180
  text "CCW" at 24.4,51.275 h2 r180
  text "JohnyDriver" at 51.75,48.175 h2
  text "v1.0" at 51.775,46.625 h2
  text "GND" at 0.5,30.5 h2 r270
  text "12B" at 0.5,24.75 h2 r270
  text "GND" at 71.4,17.138 h1.8 r90
  text "CANH" at 71.4,12.838 h1.8 r90
  text "CANL" at 71.4,8.538 h1.8 r90
  text "GND" at 54.6,0.8 h1.5
  text "RX" at 60.25,0.637 h2
  text "GND" at 14.4,0.6 h2
  text "12B" at 18.32,0.6 h2
  text "CCW" at 21.35,0.6 h2
  text "PWM" at 25.65,0.6 h2
  text "FG" at 30.267,0.6 h2
  text "TX" at 57.5,0.548 h2
Bottom Overlay:
  circle w0.2: c3.5,3.5 r2.5
  circle w0.2: c68.5,3.5 r2.5
  circle w0.2: c68.5,48.5 r2.5
  circle w0.2: c3.5,48.5 r2.5